# Altium PCB XY plaat.PcbDoc
Units mm, origin at the board's own origin, x right, y up, seen from the top; angles counter-clockwise.
Board outline 152.4 x 101.6 mm, 2 copper layers (Top Layer, Bottom Layer); 26 components, 18 nets, 101 pads, 78 vias.
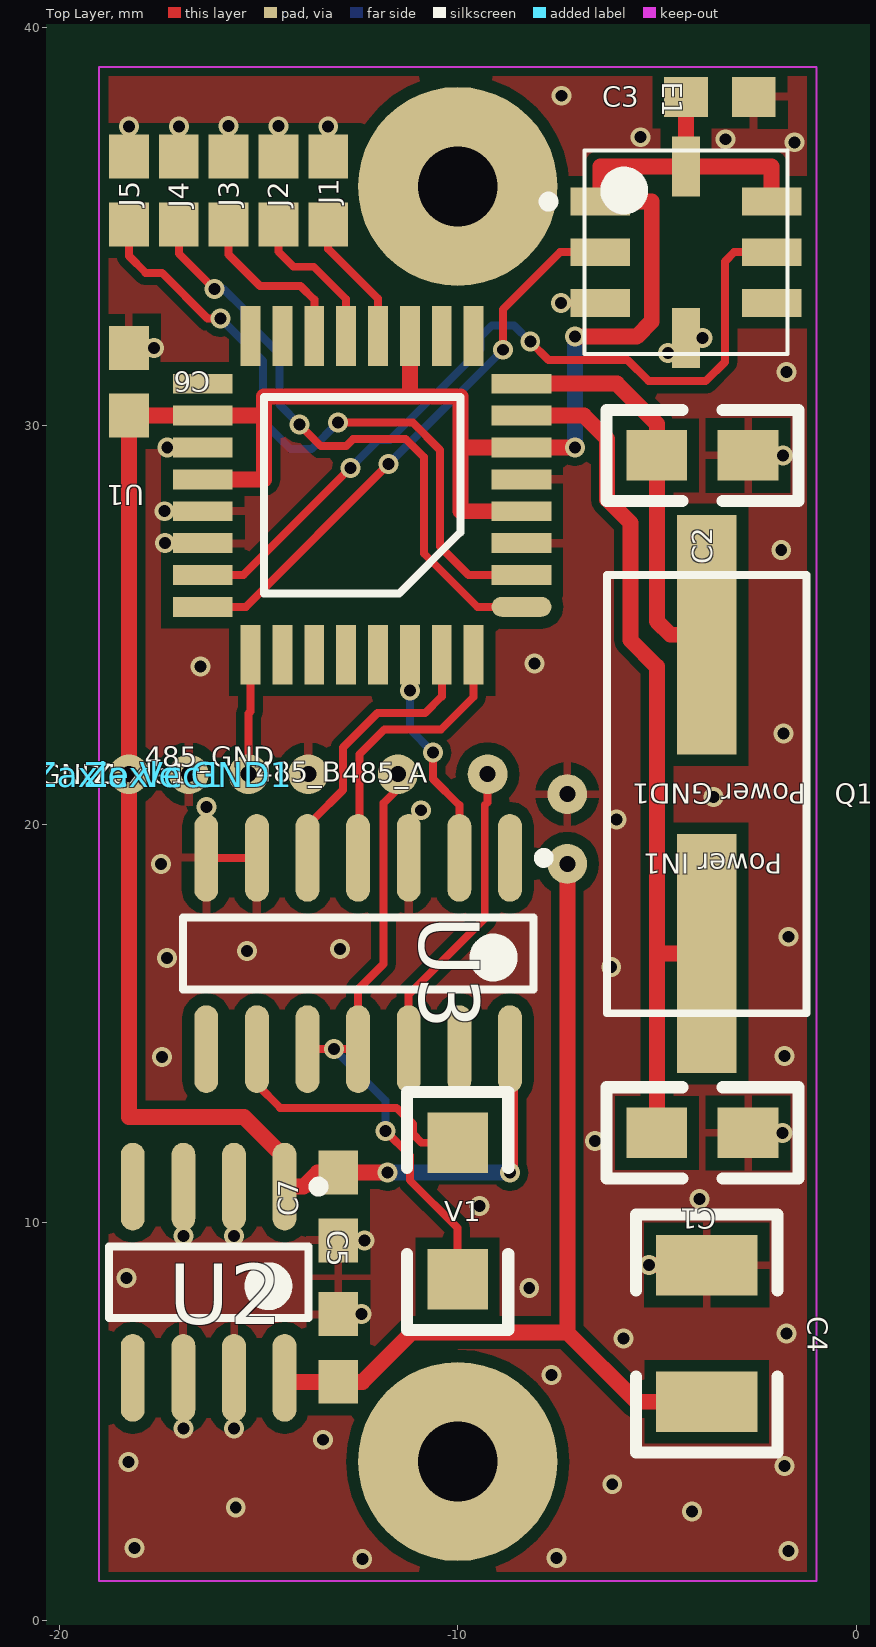
[diagram p0: Top Layer view]
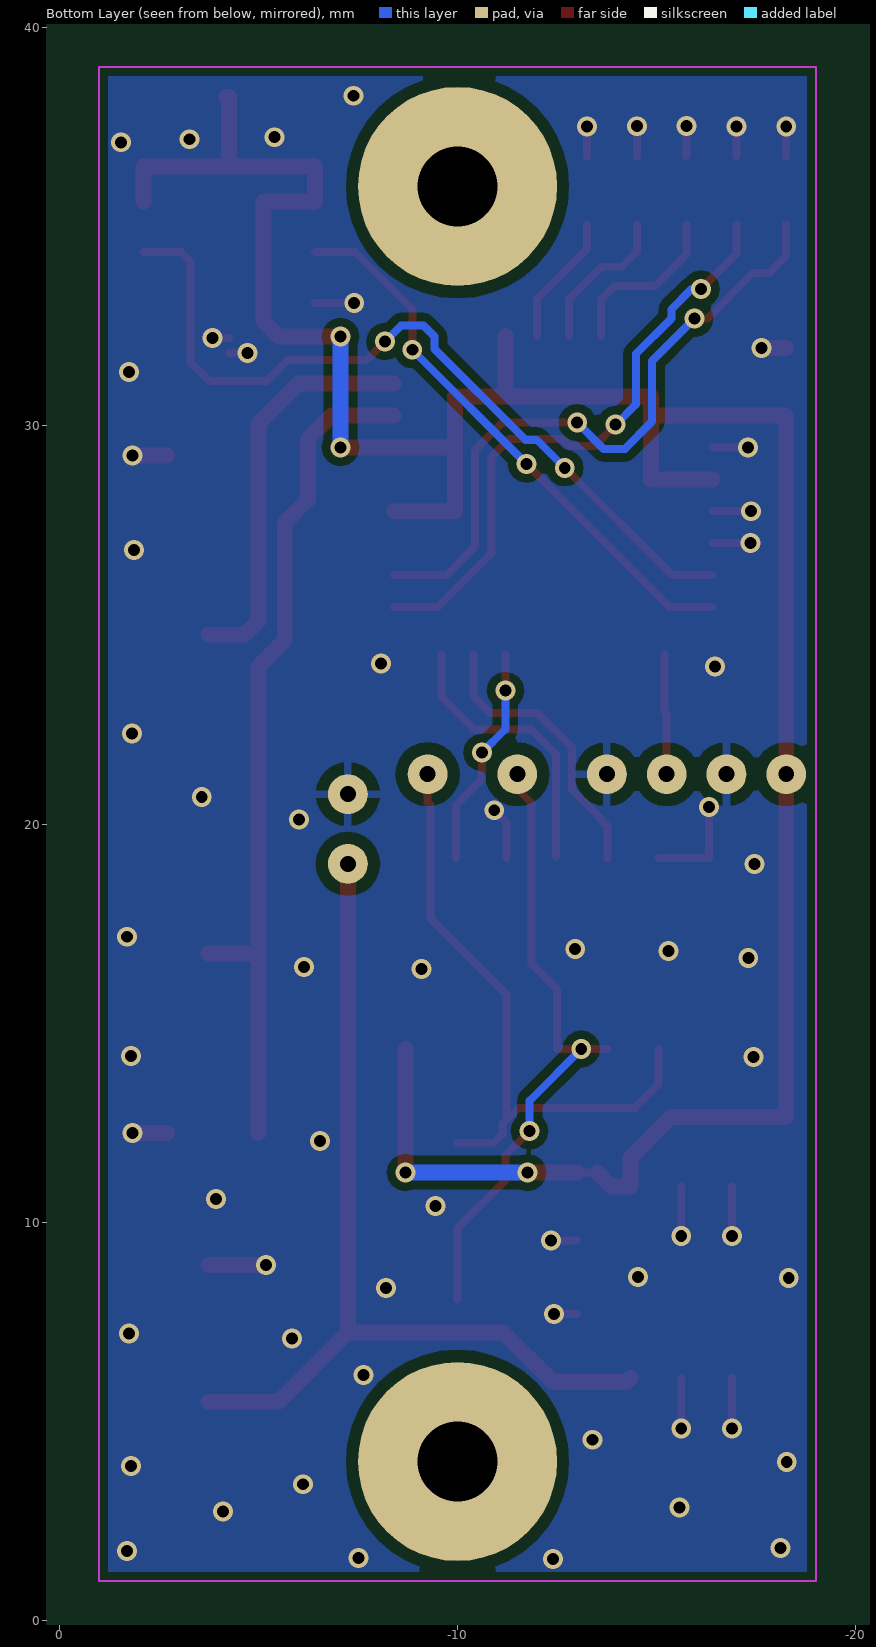
[diagram p1: Bottom Layer view, seen from below]

## Layer stack, top to bottom
Top Layer: signal copper 0.0356
Dielectric: dielectric 0.32, FR-4, Dk 4.8
Bottom Layer: signal copper 0.0356

## Board outline
-94.823,-34.95 57.577,-34.95 57.577,66.65 -94.823,66.65

## Design rules (kind name [scope] priority, off if disabled: settings)
Clearance Clearance_1 [isPad vs inPoly] p1: gap=0.3
Clearance [All] p2: gap=0.21
ComponentClearance [All] p1 off: gap=0.254 collisioncheckmode=3 verticalgap=0.254
Height [All] p1 off: minheight=0 maxheight=25.4 prefheight=12.7
PolygonConnect PolygonConnect_1 [isVia] p1: connectstyle=Direct reliefconductorwidth=0.254 reliefentries=4 polygonreliefangle="90 Angle"
PolygonConnect [not IsVia] p2: connectstyle=Relief reliefconductorwidth=0.2 reliefentries=4 polygonreliefangle="90 Angle"
RoutingVias [All] p1: holewidth=0.3 width=0.5 viastyle="Through Hole" minholewidth=0 minwidth=0 maxholewidth=10 maxwidth=10
SolderMaskExpansion [All] p1: expansion=0.102
TestPointUsage [All] p1: valid=0 allowmultiple=FALSE
Testpoint [All] p1: side=15 testpointundercomponent=TRUE minsize=1.016 maxsize=2.54 preferedsize=1.524 minholesize=0 maxholesize=1.016 preferedholesize=0.813 testpointgrid=0.025 style=1023 order=0123456789
Width [All] p1: maxlimit=10 minlimit=0.254 preferedwidth=0.254 toplayer_minwidth=0 toplayer_prefwidth=0.2 bottomlayer_minwidth=0 bottomlayer_prefwidth=0.2 minimp=50.000000 maximp=50.000000 favimp=50.000000
17 further rules are at their usual default settings.

## Components (designator, comment, footprint, x,y, rotation, side; value= is the part's Value field where it differs from the comment)
485_A "Socket" MW -9.25,21.25 r90 top
485_B "Socket" MW -11.5,21.25 r270 top
485_GND "Socket" MW -13.75,21.25 r90 top
C1 "22pF" 0805 -2.714,12.25 r180 top
C2 "22pF" 0805 -2.714,29.25 r180 top
C3 "100n" CR1608-0603 -3.42,38.25 r180 top
C4 "10u" 1210 -3.75,8.929 r270 top
C5 "100n" CR1608-0603 -13,6.85 r270 top
C6 "100n" CR1608-0603 -18.25,31.1 r270 top
C7 "100n" CR1608-0603 -13,10.4 r90 top
E1 "AD22285" ADXL -4.27,34.35 r0 top
J1 "Jumper" CR1608-0603 -13.25,35.9 r270 top
J2 "Jumper" CR1608-0603 -14.5,35.9 r270 top
J3 "Jumper" CR1608-0603 -15.75,35.9 r270 top
J4 "Jumper" CR1608-0603 -17,35.9 r270 top
J5 "Jumper" CR1608-0603 -18.25,35.9 r270 top
"Power GND1" "Socket" MW -7.25,20.75 r270 top
"Power IN1" "Socket" MW -7.25,19 r270 top
Q1 "20MHz" quartz2 -3.75,24.75 r270 top
U1 "ATMEGA88" TQFP32 -8.4,25.45 r180 top
U2 "MC78L05ACD" SOIC127P600-8N -16.25,8.5 r270 top
U3 "MAX489" SOIC127P600-14N -12.5,16.75 r270 top
V1 "AVX, 5.6V" 1206 -10,8.571 r90 top
Zaxle1 "Socket" MW -15.25,21.25 r0 top
"Zaxle GND1" "Socket" MW -16.75,21.25 r270 top
"Zaxle Vcc1" "Socket" MW -18.25,21.25 r0 top

## Footprints (in the part's own frame and the unit in brackets; to place one, negate y for a bottom-side part, rotate by r counter-clockwise, add the part's x,y. Pads: shape width x height; smd on the part's side, far side on the other; paste and mask are expansions set on the pad)
0805 [mm]
  rect 1.52x1.27 smd: 1(0,0) 2(2.286,0)
  silkscreen extent -1.27,-1.14 3.56,1.14
1206 [mm]
  rect 1.52x1.52 smd: 1(0,0) 2(3.429,0)
  silkscreen extent -1.27,-1.27 4.7,1.27
1210 [mm]
  rect 1.52x2.54 smd: 1(0,0) 2(3.429,0)
  silkscreen extent -1.27,-1.78 4.7,1.78
ADXL [mm] "QFN, 8-Leads, Body 5,1x5,1mm (max), Pitch 1,27mm, IPC Medium Density"
  rect 1.5x0.7 smd: 1(-2.15,1.27) 2(-2.15,0) 3(-2.15,-1.27) 5(2.15,-1.27) 6(2.15,0) 7(2.15,1.27)
  rect 0.7x1.5 smd: 4(0,-2.15) 8(0,2.15)
  rect 0x2.3 smd: 9(0,0)
  silkscreen extent -3.57,-2.55 2.55,2.55
CR1608-0603 [mm] "Chip Resistor; Body 1.6 x 0.8 mm (LxW typ)"
  rect 1.1x1 smd: 1(-0.85,0) 2(0.85,0)
MW [mm]
  round 1 hole 0.4: 1(0,0)
quartz2 [mm]
  rect 6x1.5 smd: 1(0,0) 2(8,0)
  silkscreen extent -1.5,-2.5 9.5,2.5
SOIC127P600-8N [mm] "SOIC, 8-Leads, Body 4.9x3.9mm, Pitch 1.27mm, IPC Medium Density"
  oval 2.2x0.6 smd: 1(-2.4,1.905) 2(-2.4,0.635) 3(-2.4,-0.635) 4(-2.4,-1.905) 5(2.4,-1.905) 6(2.4,-0.635) 7(2.4,0.635) 8(2.4,1.905)
  silkscreen extent -2.52,-2.5 0.9,2.88, body extent -2,-2.5 2,2.5, height 1.75
SOIC127P600-14N [mm] "SOIC, 14-Leads, Body 8.7x3.9mm, Pitch 1.27mm, IPC Medium Density"
  oval 2.2x0.6 smd: 1(-2.4,3.81) 2(-2.4,2.54) 3(-2.4,1.27) 4(-2.4,0) 5(-2.4,-1.27) 6(-2.4,-2.54) 7(-2.4,-3.81) 8(2.4,-3.81) 9(2.4,-2.54) 10(2.4,-1.27) 11(2.4,0) 12(2.4,1.27) 13(2.4,2.54) 14(2.4,3.81)
  silkscreen extent -2.52,-4.4 0.9,4.79, body extent -2,-4.38 2,4.38, height 1.75
TQFP32 [mm]
  oval 1.5x0.5 smd: 1(0,0)
  rect 1.5x0.5 smd: 2(0,-0.8) 3(0,-1.6) 4(0,-2.4) 5(0,-3.2) 6(0,-4) 7(0,-4.8) 8(0,-5.6) 17(8,-5.6) 18(8,-4.8) 19(8,-4) 20(8,-3.2) 21(8,-2.4) 22(8,-1.6) 23(8,-0.8) 24(8,0)
  rect 0.5x1.5 smd: 9(1.2,-6.8) 10(2,-6.8) 11(2.8,-6.8) 12(3.6,-6.8) 13(4.4,-6.8) 14(5.2,-6.8) 15(6,-6.8) 16(6.8,-6.8) 25(6.8,1.2) 26(6,1.2) 27(5.2,1.2) 28(4.4,1.2) 29(3.6,1.2) 30(2.8,1.2) 31(2,1.2) 32(1.2,1.2)
  silkscreen extent 1.54,-5.27 6.47,-0.34

## Part data
C1 C2 C3 C4 C5 C6 C7: library part CAP, "Capacitor"
E1: "Accelerometer"
J1 J2 J3 J4 J5: "Jumper Wire"
Q1: library part CRYSTAL, "Crystal"
U1: library part ATMEGA8
U2: "3-Terminal Low-Current Positive Fixed Voltage Regulator"
V1: library part "Res Varistor", "Varistor (Voltage-Sensitive Resistor)"

## Free pads (board coordinates)
  round 5 hole 2: 0(-10,4) 1(-10,36)

## Via types
v1: diameter 0.5, hole 0.3, Top Layer to Bottom Layer, 78 vias

## Nets (pads, with @x,y where several pads share a name; then routed paths per layer and width w, separated by ;. In a path a pad name is that pad's centre, name@x,y a point inside that pad or via, vN(x,y) a via of type N, cw(c..) or ccw(c..) an arc to the next point about the centre after c; other vN are vias at no path point)
A0: J1.2 U1.12 | length 3.3
  Top Layer w0.2: J1.2 -13.25,34.434 -12,33.184 U1.12
A1: J2.2 U1.13 | length 3.8
  Top Layer w0.2: J2.2 -14.5,34.363 -14.122,33.985 -13.613,33.985 -12.8,33.172 U1.13
A2: J3.2 U1.14 | length 4.3
  Top Layer w0.2: J3.2 -15.75,34.292 -14.961,33.503 -13.945,33.503 -13.6,33.158 U1.14
A3: J4.2 U1.1 | length 15.4
  Top Layer w0.2: J4.2 -17,34.315 -16.111,33.426 v1(-16.108,33.426) ; v1(-13.97,30.023) -13.437,29.489 -12.798,29.489 -12.623,29.664 -11.305,29.664 -10.851,29.21 -10.851,26.793 -9.508,25.45 U1.1
  Bottom Layer w0.2: v1(-16.108,33.426) -15.875,33.426 -15.367,32.918 -15.367,32.685 -14.474,31.793 -14.474,30.527 v1(-13.97,30.023)
A4: J5.2 U1.2 | length 16.8
  Top Layer w0.2: J5.2 -18.25,34.252 -17.831,33.833 -17.424,33.833 -16.281,32.69 v1(-15.951,32.69) ; v1(-13.004,30.074) -11.128,30.074 -10.441,29.388 -10.441,26.963 -9.728,26.25 U1.2
  Bottom Layer w0.2: v1(-15.951,32.69) -14.884,31.623 -14.884,30.099 -14.199,29.413 -13.665,29.413 v1(-13.004,30.074)
GND: 485_GND.1 "Power GND1.1" "Zaxle GND1.1" C1.1 C2.1 C3.1 C4.1 C5.1 C6.1 C7.1 E1.3 E1.4 J1.1 J2.1 J3.1 J4.1 J5.1 U1.3 U1.5 U1.19 U1.21 U1.22 U2.2 U2.3 U2.6 U2.7 U3.3 U3.6 U3.7 | length 22.5
  Top Layer w0.2: J5.1 v1(-18.25,37.503) ; v1(-17.362,27.85) U1.21 ; v1(-17.349,27.05) U1.22 ; v1(-17.29,29.45) U1.19 ; J4.1 v1(-17,37.508) ; v1(-16.885,4.832) U2.6 ; v1(-16.885,9.658) U2.3 ; v1(-16.31,20.425) U3.7 U3.6 ; J3.1 v1(-15.75,37.518) ; v1(-15.615,4.832) U2.7 ; v1(-15.615,9.658) U2.2 ; J2.1 v1(-14.5,37.512) ; J1.1 v1(-13.25,37.507) ; C5.1 v1(-12.417,7.7) ; C7.1 v1(-12.344,9.55) ; U3.3 -11.23,20.037 v1(-10.922,20.345) ; v1(-7.408,33.08) E1.3 ; v1(-4.724,31.826) E1.4@-4.267,31.826 ; E1.4 v1(-3.854,32.2)
  Top Layer w0.4: C6.1 v1(-17.628,31.95) ; v1(-5.195,8.929) C4.1 ; C1.1 v1(-1.847,12.25) ; C2.1 v1(-1.84,29.25)
  Bottom Layer w0.2: v1(-10.922,20.345) v1@-10.922,20.422
  other v1: -12.395,1.549 -7.518,1.575 -1.702,1.753 -18.11,1.829 -4.115,2.743 -15.57,2.845 -6.121,3.429 -1.803,3.886 -18.263,3.988 -13.386,4.547 -7.645,6.172 -5.842,7.087 -1.753,7.214 -8.204,8.357 -18.313,8.611 -14.529,8.636 -9.449,10.414 -3.937,10.592 -6.553,12.04 -17.424,14.148 -1.803,14.173 -9.093,16.358 -6.147,16.408 -17.297,16.637 -15.291,16.815 -12.954,16.866 -1.702,17.17 -17.45,18.999 -6.02,20.117 -3.581,20.676 -1.829,22.276 -16.459,23.952 -8.077,24.028 -1.88,26.873 -1.753,31.344 -1.549,37.109 -3.277,37.186 -5.41,37.236 -7.391,38.278
Net485_A_1: 485_A.1 U3.9 U3.12 V1.2 | length 16.2
  Top Layer w0.2: U3.9 -15.04,13.462 -14.456,12.878 -11.535,12.878 -11.125,12.468 -11.125,12.217 -10.908,12 V1.2 ; -11.23,12.573 U3.12 -11.23,15.719 -9.322,17.628 -9.322,20.472 -9.25,20.544 485_A.1
Net485_B_1: 485_B.1 U3.10 U3.11 V1.1 | length 16.1
  Top Layer w0.2: U3.10 U3.11 -12.5,15.85 -11.862,16.488 -11.862,20.523 -11.5,20.885 485_B.1 ; v1(-11.811,12.294) -11.201,11.684 -11.201,11.061 -10,9.86 V1.1@-10,8.071
  Bottom Layer w0.2: v1(-13.105,14.35) -11.811,13.056 v1(-11.811,12.294)
NetC1_2: C1.2 Q1.2 U1.7 | length 21.6
  Top Layer w0.4: U1.7 -6.831,30.25 -6.248,29.667 -6.248,28.143 -5.664,27.559 -5.664,24.613 -5,23.948 C1.2 ; -4.989,16.75 Q1.2
NetC2_2: C2.2 Q1.1 U1.8 | length 10.2
  Top Layer w0.4: U1.8 -6.006,31.05 -5,30.044 -5,25.091 -4.659,24.75 Q1.1
NetC4_2: "Power IN1.1" C4.2 C5.2 U2.8 | length 23.8
  Top Layer w0.2: C5.2@-13.1,6.1 C5.2
  Top Layer w0.4: U2.8 -14.245,6 -12.39,6 -11.151,7.238 -7.25,7.238 ; -7.25,19 -7.25,7.238 ; C4.2 -5.512,5.5 -7.25,7.238
NetE1_2: E1.2 U1.24 | length 14.3
  Top Layer w0.2: U1.24 -15.317,25.45 v1(-11.735,29.032) ; v1(-8.865,31.902) -8.865,32.918 -7.433,34.35 E1.2
  Bottom Layer w0.2: v1(-11.735,29.032) v1(-8.865,31.902)
NetE1_6: E1.6 U1.23 | length 20.5
  Top Layer w0.2: U1.23 -15.381,26.25 v1(-12.691,28.94) ; v1(-8.179,32.106) -7.722,31.648 -5.74,31.648 -5.207,31.115 -3.777,31.115 -3.294,31.598 -3.294,34.12 -3.064,34.35 E1.6
  Bottom Layer w0.2: v1(-12.691,28.94) -11.989,29.642 -11.705,29.642 -9.424,31.923 -9.424,32.232 -9.144,32.512 -8.585,32.512 v1(-8.179,32.106)
NetU1_25: U1.25 Zaxle1.1 | length 3
  Top Layer w0.2: Zaxle1.1 -15.25,22.774 -15.2,22.824 U1.25
NetU1_30: U1.30 U3.2 | length 5.6
  Top Layer w0.2: v1(-11.2,23.347) U1.30 ; v1(-10.617,21.793) -10.617,21.13 -9.96,20.472 U3.2
  Bottom Layer w0.2: v1(-11.2,23.347) -11.2,22.376 v1(-10.617,21.793)
NetU1_31: U1.31 U3.5 | length 7.2
  Top Layer w0.2: U3.5 -13.77,19.936 U3.5@-13.602,20.104 ; U3.5@-13.614,20.117 -12.878,20.853 -12.878,21.92 -12.011,22.787 -10.817,22.787 -10.4,23.204 U1.31
NetU1_32: U1.32 U3.4 | length 7.1
  Top Layer w0.2: U3.4@-12.468,19.182 -12.468,21.75 -11.841,22.377 -10.414,22.377 -9.6,23.191 U1.32
VCC: "Zaxle Vcc1.1" C3.2 C6.2 C7.2 E1.1 E1.7 E1.8 U1.4 U1.6 U1.11 U1.18 U1.20 U2.1 U3.14 | length 69.1
  Top Layer w0.2: -13.515,11.25 C7.2
  Top Layer w0.4: U1.20 -14.859,28.65 -14.859,30.734 -9.931,30.734 -9.931,27.85 U1.4 ; -15.064,30.25 U1.18 C6.2 -18.25,12.649 -15.367,12.649 -14.345,11.627 U2.1 -13.865,10.9 -13.515,11.25 ; C7.2 v1(-11.761,11.25) ; -11.2,30.734 U1.11 ; -9.931,29.45 v1(-7.061,29.45) ; v1(-8.69,11.25) U3.14 ; v1(-7.061,32.233) -5.512,32.233 -5.131,32.614 -5.131,35.62 E1.1 -6.42,36.5 -2.12,36.5 E1.7 ; E1.8 C3.2 C3.2@-4.2,38.25
  Bottom Layer w0.4: v1(-11.761,11.25) v1(-8.69,11.25) ; v1(-7.061,29.45) v1(-7.061,32.233)
pads on no net: E1.5 E1.9 U1.9 U1.10 U1.15 U1.16 U1.17 U1.26 U1.27 U1.28 U1.29 U2.4 U2.5 U3.1 U3.8 U3.13

## Polygon pours and split planes (outlines as drawn)
GND on Top Layer (solid, remove dead copper): -19.355,39.649 -0.102,39.649 -0.102,0.051 -20.218,0.051
GND on Bottom Layer (solid, remove dead copper): -19.736,39.827 -0.102,39.827 -0.102,-0.33 -20.345,-0.33

## Keep-outs
Keep-Out Layer:
  lines w0.05: -19,1 -1,1 -1,39 -19,39 -19,1

## Silkscreen, mask and mechanical layers (free items; w line width, h text height)
Mechanical 1:
  circle w0.05: c-10,4 r1.621
  circle w0.05: c-10,36 r1.621
  circle w0.05: c-45,20 r8.5
  lines w0.05: -20,0 -20,18 ; -20,40 -20,22 ; -18,0 -18,18 ; -17.621,0 -17.621,18 ; -14.379,0 -14.379,18 ; -14,0 -14,18 ; -11.932,3.482 cw(c-10,4) -10.518,2.068 ; -11.932,35.482 cw(c-10,36) -10.518,34.068 ; -6,0 -6,18 ; -5.621,0 -5.621,18 ; -2.379,0 -2.379,18 ; -2,0 -2,18 ; -30,0 -30,40 ; -30,0 -60,0 -60,40 -30,40 ; -30,0 0,0 0,18 -20,18 ; -30,40 0,40 0,22 -20,22 ; -20,18 -20,22